# Altium PCB PCB.PcbDoc
Units mm, origin at the board's own origin, x right, y up, seen from the top; angles counter-clockwise.
Board outline 176 x 141 mm, 4 copper layers (Top Layer, Int1 (GND), Int2 (PWR), Bottom Layer), stack 1.369 mm thick; 72 components, 104 nets, 555 pads, 74 vias.
Unrouted connection lines stored in the file: 55.
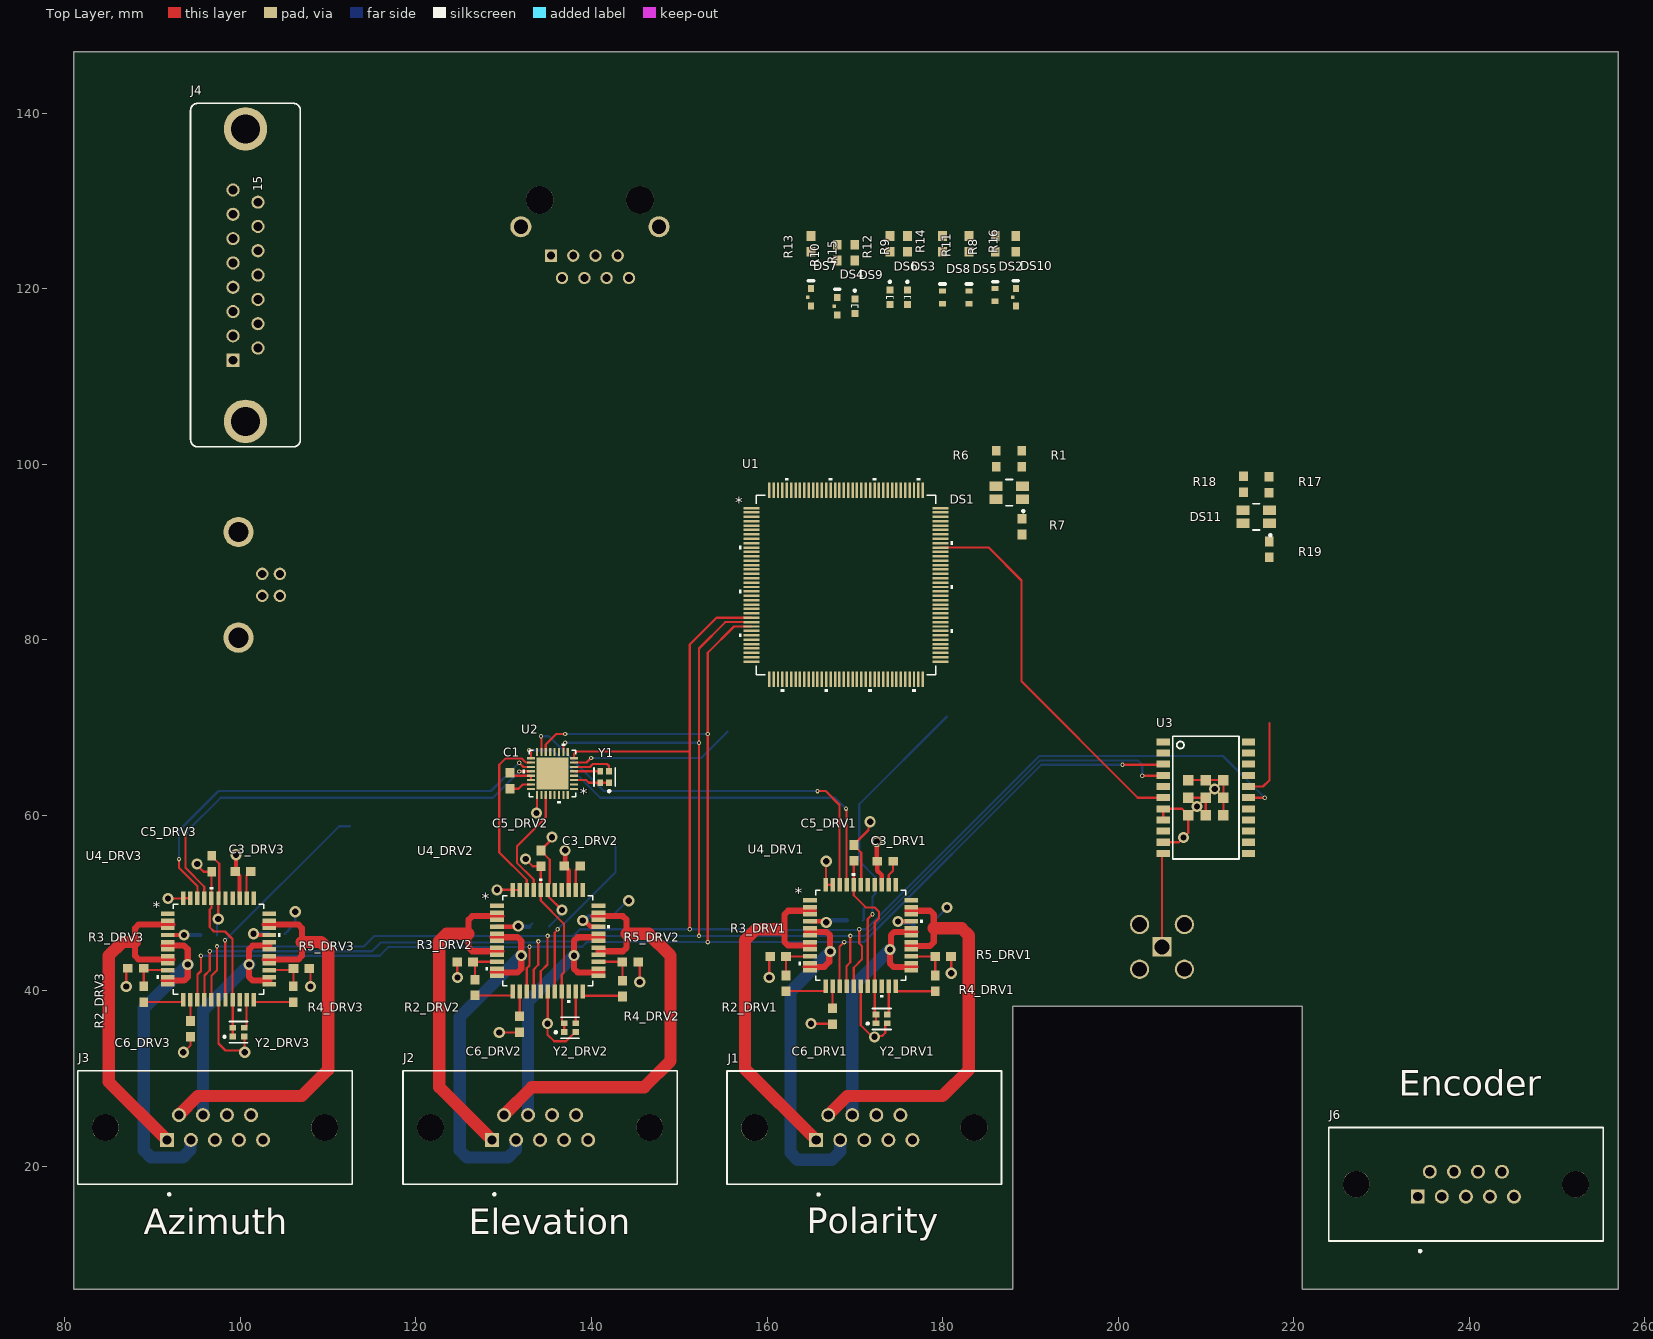
[diagram p0: Top Layer view]
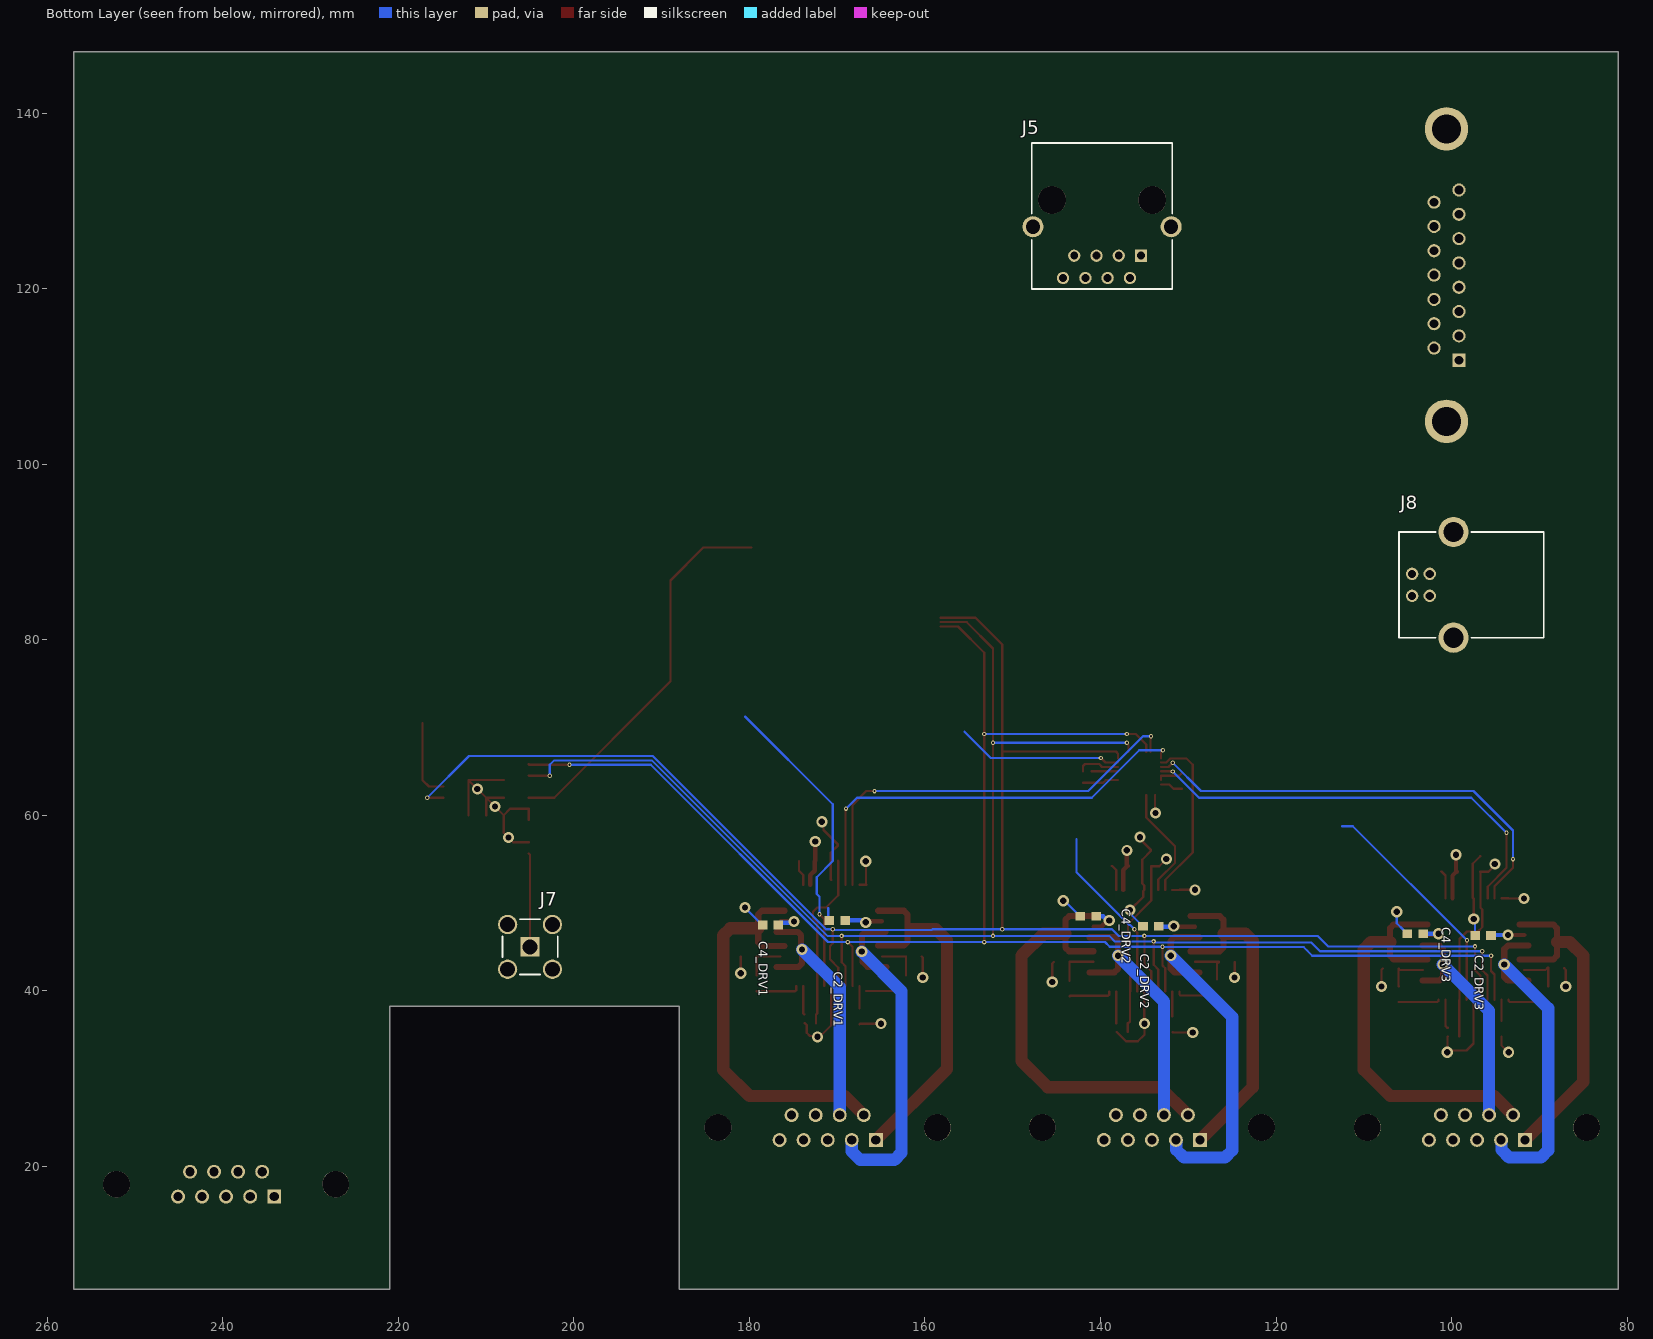
[diagram p1: Bottom Layer view, seen from below]
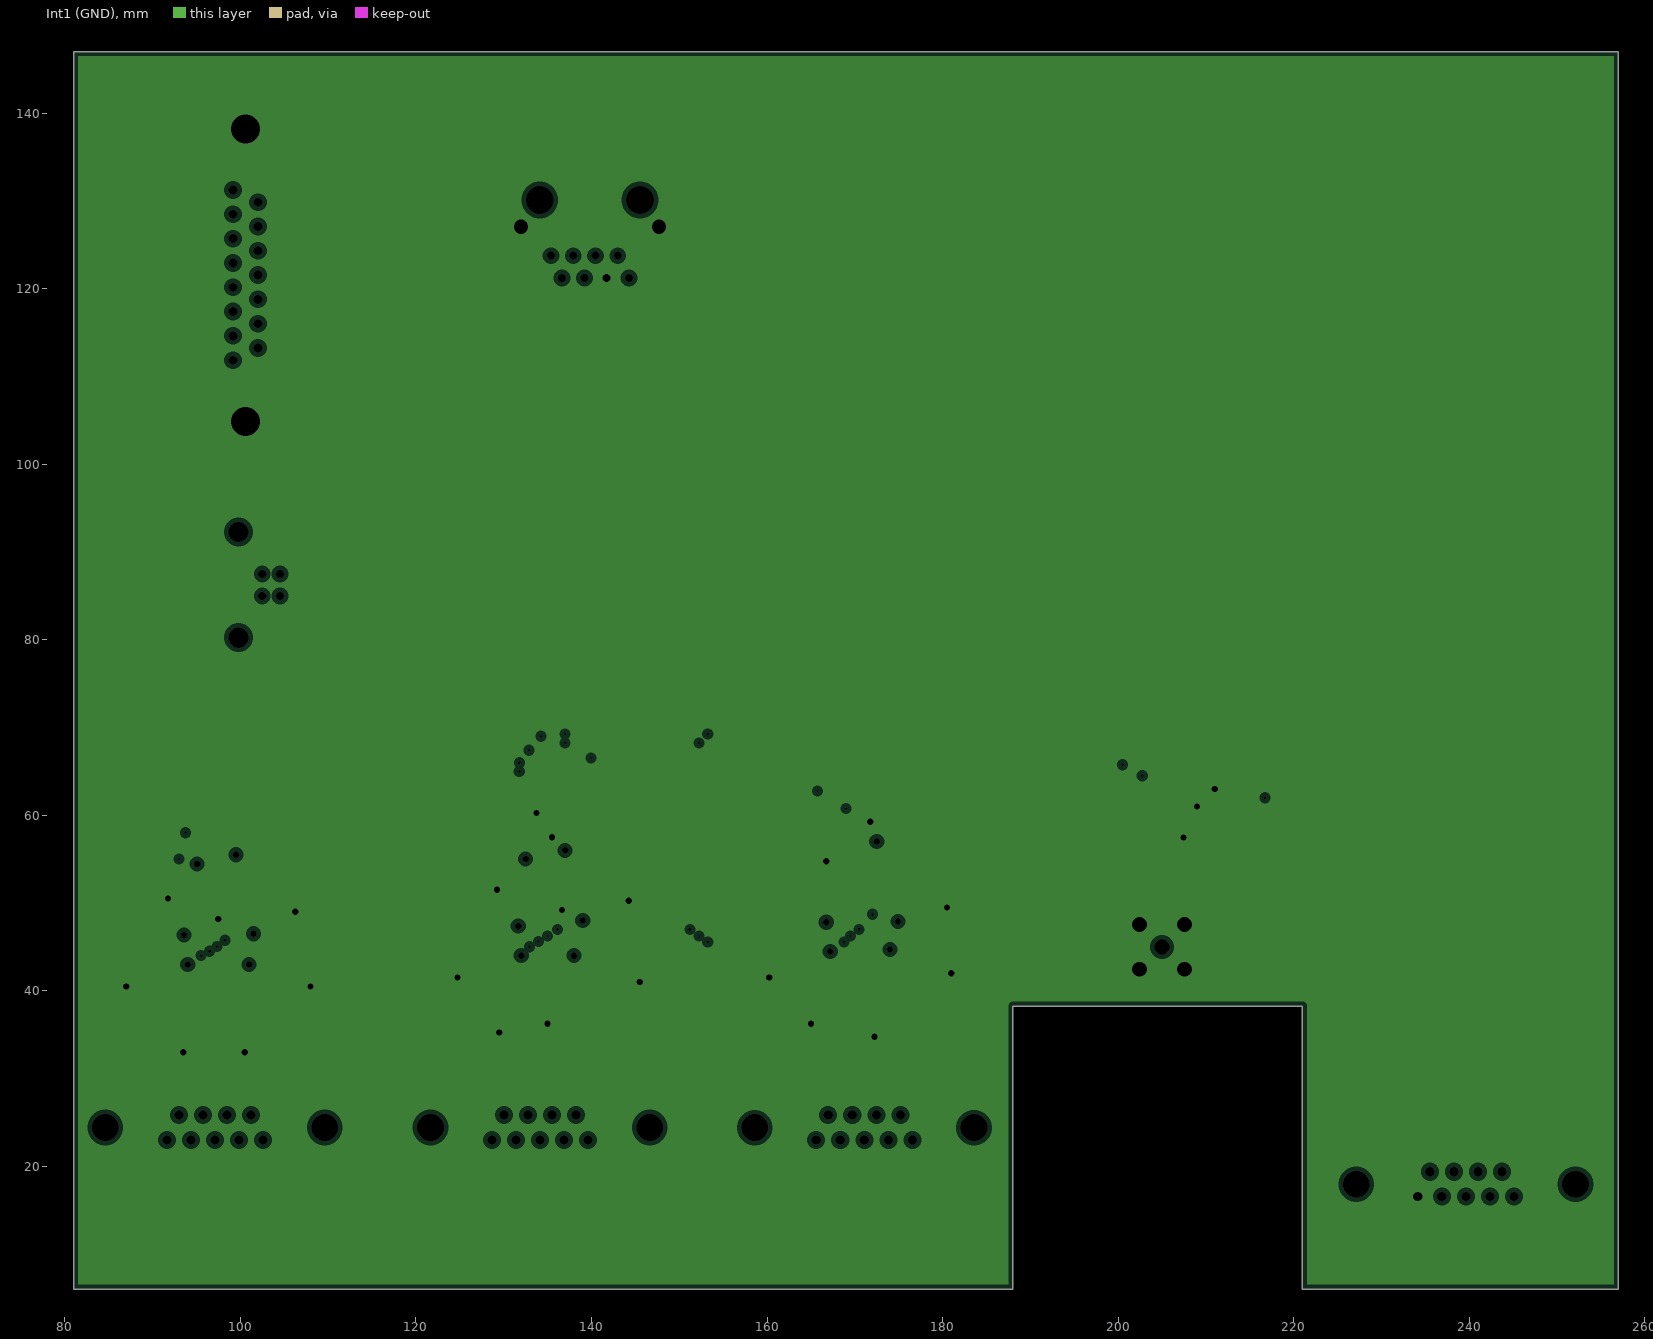
[diagram p2: Int1 (GND), clearances drawn from the general rule]
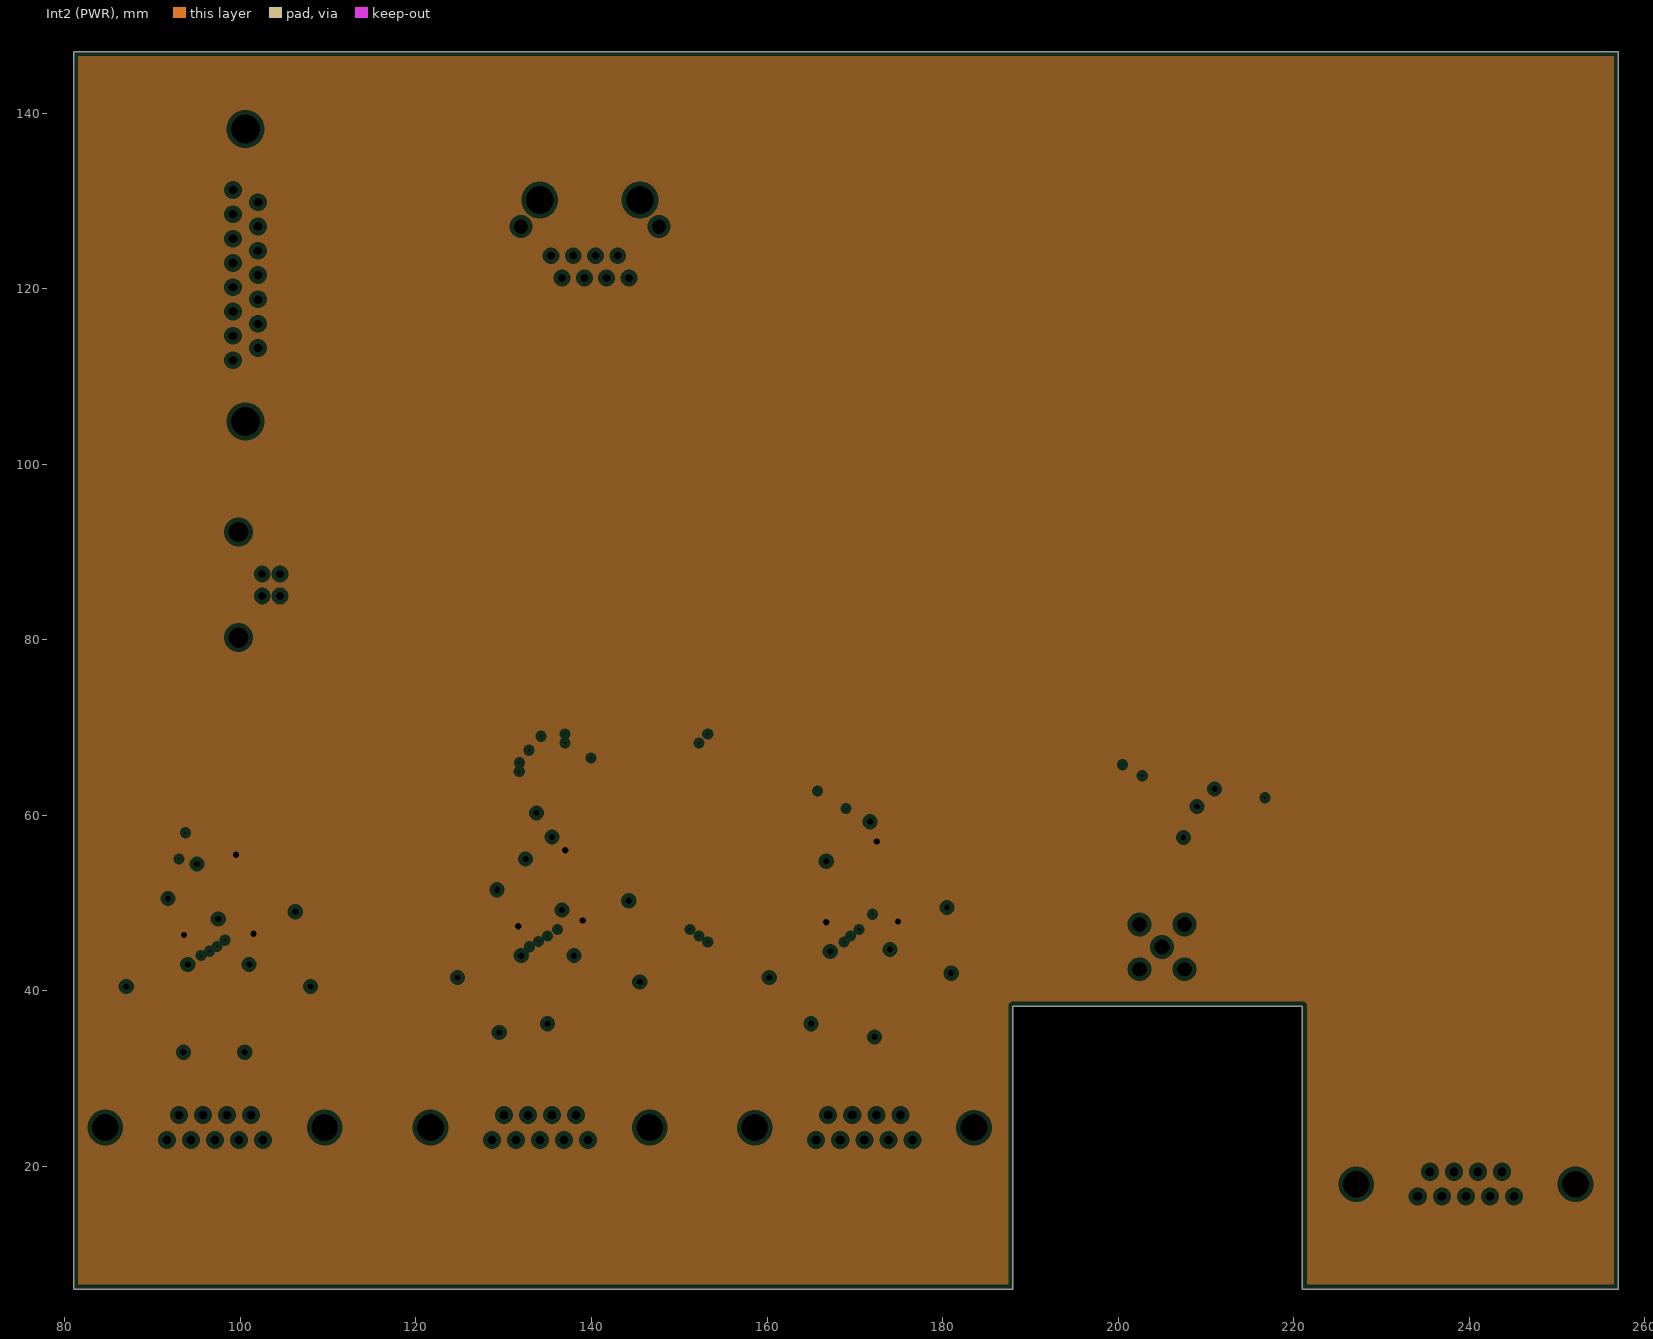
[diagram p3: Int2 (PWR), clearances drawn from the general rule]

## Layer stack, top to bottom
Top Solder: solder mask 0.0254, SM-001, Dk 4
Top Layer: signal copper 0.035
Dielectric 1: prepreg 0.1295, PP-017, Dk 4.3
Dielectric 2: prepreg 0.1295, PP-017, Dk 4.3
Int1 (GND): plane copper 0.035, net GND
Dielectric 3: core 0.7112, Core-039, Dk 4.8
Int2 (PWR): plane copper 0.035, net +12
Dielectric 4: prepreg 0.1295, PP-017, Dk 4.3
Dielectric 5: prepreg 0.1295, PP-017, Dk 4.3
Bottom Layer: signal copper 0.035
Bottom Solder: solder mask 0.0254, SM-001, Dk 4

## Board outline
188,6 188,38.25 221,38.25 221,6 257,6 257,147 81,147 81,6

## Design rules (kind name [scope] priority, off if disabled: settings)
BoardOutlineClearance [All] p1: gap=3 ignorepadtopadclearanceinfootprint=FALSE
Clearance "Via Same net clearance" [All] p1 off: gap=0 ignorepadtopadclearanceinfootprint=FALSE except(0.254: Via-Via)
Clearance [All] p2: gap=0.1 ignorepadtopadclearanceinfootprint=FALSE except(0: Arc-Hole Track-Hole SMDPad-Hole THPad-Hole Via-Hole Fill-Hole Poly-Hole Region-Hole Text-Text Text-Hole; 0.13: SMDPad-SMDPad SMDPad-THPad SMDPad-Via SMDPad-Fill SMDPad-Poly SMDPad-Region; 0.15: Arc-Text Track-Text SMDPad-Text THPad-Text Via-Text Fill-Text Poly-Text Region-Text; 0.254: Fill-Fill Fill-Poly Fill-Region Poly-Poly Poly-Region Region-Region; 0.5: THPad-THPad THPad-Via THPad-Fill THPad-Poly THPad-Region Via-Via Via-Fill Via-Poly Via-Region)
PlaneClearance [All] p1: clearance=0.508
PlaneConnect [All] p1: planeconnectstyle=Relief reliefexpansion=0.508 reliefentries=4 reliefconductorwidth=0.254 reliefairgap=0.254
PolygonConnect [All] p1: connectstyle=Relief reliefconductorwidth=0.254 reliefentries=4 polygonreliefangle="90 Angle" airgapwidth=0.254
RoutingVias RoutingVias_1 [InNetClass('Signal HS')] p1: holewidth=0.25 width=0.5 viastyle="Through Hole" minholewidth=0.2 minwidth=0.4 maxholewidth=0.35 maxwidth=0.7
RoutingVias [All] p2: holewidth=0.711 width=1.27 viastyle="Through Hole" minholewidth=0.711 minwidth=1.27 maxholewidth=0.711 maxwidth=1.27
SolderMaskExpansion [All] p1: expansion=0.102 istentingtop=FALSE
Width Width_1 [InNet('+12')] p1: maxlimit=1 minlimit=0.4 preferedwidth=0.5 minimp=50.000000 maximp=50.000000 favimp=50.000000
Width Motor [InNetClass('Motor')] p2: maxlimit=3 minlimit=0.7 preferedwidth=1.2 minimp=50.000000 maximp=50.000000 favimp=50.000000
Width Power [InNetClass('All Nets')] p3: maxlimit=0.254 minlimit=0.254 preferedwidth=0.254
Width [All] p4: maxlimit=1 minlimit=0.254 preferedwidth=0.254 minimp=50.000000 maximp=50.000000 favimp=50.000000
28 further rules are at their usual default settings.

## Classes and differential pairs
net class "Signal HS": "CSN AZI" "CSN CTRL" "CSN ELV" "CSN GPS" "CSN POL" "GPS ON_OFF" MISO MOSI NetU2_15 NetU2_17 NetU2_18 NetU2_19 NetU2_20 NetU2_27 SCK
net class Power: NetJ1_1
net class Motor: NetJ1_1 NetJ1_2 NetJ1_6 NetJ1_7 NetJ2_1 NetJ2_2 NetJ2_6 NetJ2_7 NetJ3_1 NetJ3_2 NetJ3_6 NetJ3_7
channel class Stepper-driver: DRV1 DRV2 DRV3
component class Main: C1 DS1 DS2 DS3 DS4 DS5 DS6 DS7 DS8 DS9 DS10 DS11 J1 J2 J3 J4 J5 J6 J7 J8 R1 R6 R7 R8 R9 R10 R11 R12 R13 R14 R15 R16 R17 R18 R19 U1 U2 U3 Y1
component class DRV3: C2_DRV3 C3_DRV3 C4_DRV3 C5_DRV3 C6_DRV3 R2_DRV3 R3_DRV3 R4_DRV3 R5_DRV3 U4_DRV3 Y2_DRV3
component class DRV2: C2_DRV2 C3_DRV2 C4_DRV2 C5_DRV2 C6_DRV2 R2_DRV2 R3_DRV2 R4_DRV2 R5_DRV2 U4_DRV2 Y2_DRV2
component class DRV1: C2_DRV1 C3_DRV1 C4_DRV1 C5_DRV1 C6_DRV1 R2_DRV1 R3_DRV1 R4_DRV1 R5_DRV1 U4_DRV1 Y2_DRV1

## Components (designator, comment, footprint, x,y, rotation, side; value= is the part's Value field where it differs from the comment)
C1 "Cap SMD" "C0603 (1608)" 130.726,63.92 r90 top value=10nF
C2_DRV1 "Cap SMD" "C0603 (1608)" 170,48 r180 bottom value=10nF (schematic designator C2)
C2_DRV2 "Cap SMD" "C0603 (1608)" 134.256,47.354 r180 bottom value=10nF (schematic designator C2)
C2_DRV3 "Cap SMD" "C0603 (1608)" 96.42,46.284 r180 bottom value=10nF (schematic designator C2)
C3_DRV1 "Cap SMD" "C0603 (1608)" 173.467,54.762 r0 top value=10nF (schematic designator C3)
C3_DRV2 "Cap SMD" "C0603 (1608)" 137.812,54.209 r0 top value=10nF (schematic designator C3)
C3_DRV3 "Cap SMD" "C0603 (1608)" 100.298,53.578 r0 top value=10nF (schematic designator C3)
C4_DRV1 "Cap SMD" "C0603 (1608)" 177.6,47.5 r180 bottom value=10nF (schematic designator C4)
C4_DRV2 "Cap SMD" "C0603 (1608)" 141.4,48.5 r180 bottom value=10nF (schematic designator C4)
C4_DRV3 "Cap SMD" "C0603 (1608)" 104.15,46.5 r180 bottom value=10nF (schematic designator C4)
C5_DRV1 "Cap SMD" "C0603 (1608)" 169.91,55.71 r270 top value=10nF (schematic designator C5)
C5_DRV2 "Cap SMD" "C0603 (1608)" 134.256,55.087 r270 top value=10nF (schematic designator C5)
C5_DRV3 "Cap SMD" "C0603 (1608)" 96.742,54.467 r270 top value=10nF (schematic designator C5)
C6_DRV1 "Cap SMD" "C0603 (1608)" 167.457,37.097 r90 top value=10nF (schematic designator C6)
C6_DRV2 "Cap SMD" "C0603 (1608)" 131.81,36.19 r90 top value=10nF (schematic designator C6)
C6_DRV3 "Cap SMD" "C0603 (1608)" 94.329,35.66 r90 top value=10nF (schematic designator C6)
DS1 "ASMB-BTE1-0B332" FP-ASMB-BTE1-0B332-MFG 187.6,96.75 r90 top
DS2 "TLMB1100-GS08" VISH-TLMX1100-2_V 186,119.275 r90 top
DS3 "APG1608SURKC/T" KING-LED0603-25-RED_V 176,119 r90 top
DS4 "HSMA-C120" AVAG-HSMA-C120-2_V 168,118 r90 top
DS5 "TLMB1100-GS08" VISH-TLMX1100-2_V 183,119 r90 top
DS6 "APG1608SURKC/T" KING-LED0603-25-RED_V 174,119 r90 top
DS7 "HSMA-C120" AVAG-HSMA-C120-2_V 165,119 r90 top
DS8 "TLMB1100-GS08" VISH-TLMX1100-2_V 180,119 r90 top
DS9 "APG1608SURKC/T" KING-LED0603-25-RED_V 170,118 r90 top
DS10 "HSMA-C120" AVAG-HSMA-C120-2_V 188.35,119 r90 top
DS11 "ASMB-BTE1-0B332" FP-ASMB-BTE1-0B332-MFG 215.75,94 r90 top
J1 "1-5747150-6" FP-1-5747150-6-MFG 171.09,24.406 r180 top
J2 "1-5747150-6" FP-1-5747150-6-MFG 134.15,24.425 r180 top
J3 "1-5747150-6" FP-1-5747150-6-MFG 97.105,24.42 r180 top
J4 "61801525023" 61801525023 100.58,121.54 r90 top
J5 "615008140421" 615008140421 139.825,128.274 r0 bottom
J6 "1-5747150-6" FP-1-5747150-6-MFG 239.629,17.96 r180 top
J7 "1053354-1" TECO-1053354-1_V 205,45 r180 bottom
J8 "61400416121" 61400416121 97.75,86.25 r90 bottom
R1 "Res" "R0603 (1608)" 189.025,100.612 r90 top
R2_DRV1 "Res" "R0603 (1608)" 162.163,40.84 r90 top (schematic designator R2)
R2_DRV2 "Res" "R0603 (1608)" 126.73,40.37 r90 top (schematic designator R2)
R2_DRV3 "Res" "R0603 (1608)" 88.995,39.608 r90 top (schematic designator R2)
R3_DRV1 "Res" "R0603 (1608)" 161.263,43.899 r180 top (schematic designator R3)
R3_DRV2 "Res" "R0603 (1608)" 125.609,43.287 r180 top (schematic designator R3)
R3_DRV3 "Res" "R0603 (1608)" 88.075,42.554 r180 top (schematic designator R3)
R4_DRV1 "Res" "R0603 (1608)" 179.181,40.84 r90 top (schematic designator R4)
R4_DRV2 "Res" "R0603 (1608)" 143.527,40.239 r90 top (schematic designator R4)
R4_DRV3 "Res" "R0603 (1608)" 106.013,39.608 r90 top (schematic designator R4)
R5_DRV1 "Res" "R0603 (1608)" 180.07,43.899 r0 top (schematic designator R5)
R5_DRV2 "Res" "R0603 (1608)" 144.416,43.287 r0 top (schematic designator R5)
R5_DRV3 "Res" "R0603 (1608)" 106.954,42.534 r0 top (schematic designator R5)
R6 "Res" "R0603 (1608)" 186.125,100.612 r90 top
R7 "Res" "R0603 (1608)" 189.052,92.892 r270 top
R8 "Res" "R0603 (1608)" 186,125.1 r90 top
R9 "Res" "R0603 (1608)" 176,125.1 r90 top
R10 "Res" "R0603 (1608)" 168,124.1 r90 top
R11 "Res" "R0603 (1608)" 183,125.1 r90 top
R12 "Res" "R0603 (1608)" 174,125.1 r90 top
R13 "Res" "R0603 (1608)" 165,125.1 r90 top
R14 "Res" "R0603 (1608)" 180,125.1 r90 top
R15 "Res" "R0603 (1608)" 170,124.1 r90 top
R16 "Res" "R0603 (1608)" 188.35,125.1 r90 top
R17 "Res" "R0603 (1608)" 217.196,97.658 r90 top
R18 "Res" "R0603 (1608)" 214.289,97.709 r90 top
R19 "Res" "R0603 (1608)" 217.226,90.291 r270 top
U1 "STM32F765ZIT7" LQFP-144_STM-M 169,86.25 r0 top
U2 "TMC429-LI" QFN32_5X5_TRI-M 135.552,64.75 r180 top
U3 "A2200-A" XCVR_A2200-A 210,62 r0 top
U4_DRV1 "TMC2660-PA" LQFP44_12X12_TRI-M 170.672,46.312 r0 top (schematic designator U4)
U4_DRV2 "TMC2660-PA" LQFP44_12X12_TRI-M 135.018,45.7 r0 top (schematic designator U4)
U4_DRV3 "TMC2660-PA" LQFP44_12X12_TRI-M 97.504,44.751 r0 top (schematic designator U4)
Y1 "ASA-16.000MHZ-L-T" FP-ASA-MFG 141.5,64.35 r90 top
Y2_DRV1 "ASA-16.000MHZ-L-T" FP-ASA-MFG 173.07,36.79 r0 top (schematic designator Y2)
Y2_DRV2 "ASA-16.000MHZ-L-T" FP-ASA-MFG 137.54,35.79 r0 top (schematic designator Y2)
Y2_DRV3 "ASA-16.000MHZ-L-T" FP-ASA-MFG 99.79,35.29 r0 top (schematic designator Y2)

## Footprints (in the part's own frame and the unit in brackets; to place one, negate y for a bottom-side part, rotate by r counter-clockwise, add the part's x,y. Pads: shape width x height; smd on the part's side, far side on the other; paste and mask are expansions set on the pad)
61400416121 [mm] "USB 2.0 Type B Horizontal"
  round 1.42 hole 0.92: 1(1.25,6.74) 2(-1.25,6.74) 3(-1.25,4.74) 4(1.25,4.74)
  round 3.45 hole 2.3: Shell(-6.02,2.03) Shell(6.02,2.03)
  silkscreen extent -6.02,-8.25 6.02,8.25, body extent -7.48,-8.25 7.48,8.25, height 11.08
61801525023 [mm] "15 pins, straight"
  rect 1.5x1.5 hole 1: 1(-9.695,1.42)
  round 1.5 hole 1: 2(-6.925,1.42) 3(-4.155,1.42) 4(-1.385,1.42) 5(1.385,1.42) 6(4.155,1.42) 7(6.925,1.42) 8(9.695,1.42) 9(-8.31,-1.42) 10(-5.54,-1.42) 11(-2.77,-1.42) 12(0,-1.42) 13(2.77,-1.42) 14(5.54,-1.42) 15(8.31,-1.42)
  round 4.95 hole 3.3: M1(-16.66,0) M2(16.66,0)
  silkscreen extent -19.57,-6.25 19.57,6.25, body extent -19.57,-6.25 19.57,6.25, height 12.97
615008140421 [mm] "Modular Jack Vertical Shielded 8P8C Rear Post"
  rect 1.4x1.4 hole 0.9: 1(-4.445,4.524)
  round 1.4 hole 0.9: 2(-3.175,7.064) 3(-1.905,4.524) 4(-0.635,7.064) 5(0.635,4.524) 6(1.905,7.064) 7(3.175,4.524) 8(4.445,7.064)
  round 3.17 hole 3.17 unplated: MH1(-5.715,-1.826) MH2(5.715,-1.826)
  round 2.4 hole 1.6: S1(-7.875,1.224) S2(7.875,1.224)
  silkscreen extent -8,-8.32 8,8.32, body extent -8,-8.32 8,8.33, height 16.65
AVAG-HSMA-C120-2_V [mm] "LED, 2-Leads, Body 1.6x0.6mm"
  rect 0.8x0.7 smd: 1(-1,0) 2(1,0)
  rect 0.4x0.4 smd: 3(0,0.35)
  silkscreen extent 1.9,-0.3 1.9,0.3, body extent -0.8,-0.3 0.8,0.3, height 1
"C0603 (1608)" [mm] "Chip Capacitor, 2-Leads, Body 1,60x0,81mm, IPC Low Density"
  rect 1.1x1 smd: 1(-0.9,0) 2(0.9,0)
  body extent -0.8,-0.41 0.8,0.42, height 0.79
FP-1-5747150-6-MFG [mm]
  rect 1.59x1.59 hole 1.04 paste-1000 mask+0: 1(5.485,1.42)
  round 1.59 hole 1.04 paste-1000 mask+0: 2(2.745,1.42) 3(0.005,1.42) 4(-2.735,1.42) 5(-5.475,1.42) 6(4.115,-1.42) 7(1.375,-1.42) 8(-1.365,-1.42) 9(-4.105,-1.42)
  round 3.05 hole 3.05 unplated paste-1000 mask+0: ""(-12.495,0) ""(12.495,0)
  silkscreen extent -15.64,-6.47 15.64,7.74, body extent -15.74,-6.57 15.74,6.57, height 0.25
FP-ASA-MFG [mm]
  rect 0.75x0.65 smd paste+0 mask+0: 1(-0.65,-0.5) 2(0.65,-0.5) 3(0.65,0.5) 4(-0.65,0.5)
  silkscreen extent -1.72,-1.2 1.05,1.2, body extent -1.15,-0.95 1.15,0.95, height 0.25
FP-ASMB-BTE1-0B332-MFG [mm]
  rect 1.1x1.5 smd paste+0 mask+0: 1(-0.75,-1.5) 2(-0.75,1.5) 3(0.75,1.5) 4(0.75,-1.5)
  silkscreen extent -2.22,-1.73 1.5,0.38, body extent -1.6,-2.35 1.6,2.35, height 0.25
KING-LED0603-25-RED_V [mm] "LED, SMT, Body 1.6x0.8mm, 0.28mm Thickness, Red"
  rect 0.8x0.8 smd paste+0: 1(-0.825,0) 2(0.825,0)
  silkscreen extent -0.2,-0.4 1.9,0.4, body extent -0.8,-0.4 0.8,0.4, height 0.28
LQFP44_12X12_TRI-M [mil]
  rect 61x20 smd paste+0 mask+0: 1(-227.5,157.48) 2(-227.5,125.98) 3(-227.5,94.49) 4(-227.5,62.99) 5(-227.5,31.5) 6(-227.5,0) 7(-227.5,-31.5) 8(-227.5,-62.99) 9(-227.5,-94.49) 10(-227.5,-125.98) 11(-227.5,-157.48) 23(227.5,-157.48) 24(227.5,-125.98) 25(227.5,-94.49) 26(227.5,-62.99) 27(227.5,-31.5) 28(227.5,0) 29(227.5,31.5) 30(227.5,62.99) 31(227.5,94.49) 32(227.5,125.98) 33(227.5,157.48)
  rect 20x61 smd paste+0 mask+0: 12(-157.48,-227.5) 13(-125.98,-227.5) 14(-94.49,-227.5) 15(-62.99,-227.5) 16(-31.5,-227.5) 17(0,-227.5) 18(31.5,-227.5) 19(62.99,-227.5) 20(94.49,-227.5) 21(125.98,-227.5) 22(157.48,-227.5) 34(157.48,227.5) 35(125.98,227.5) 36(94.49,227.5) 37(62.99,227.5) 38(31.5,227.5) 39(0,227.5) 40(-31.5,227.5) 41(-62.99,227.5) 42(-94.49,227.5) 43(-125.98,227.5) 44(-157.48,227.5)
  silkscreen extent -278,-278 278,278, body extent -236,-236 236,236, height 63
LQFP-144_STM-M [mil]
  rect 70x11 smd paste+0 mask+0: 1(-424,344.49) 2(-424,324.8) 3(-424,305.12) 4(-424,285.43) 5(-424,265.75) 6(-424,246.06) 7(-424,226.38) 8(-424,206.69) 9(-424,187.01) 10(-424,167.32) 11(-424,147.64) 12(-424,127.95) 13(-424,108.27) 14(-424,88.58) 15(-424,68.9) 16(-424,49.21) 17(-424,29.53) 18(-424,9.84) 19(-424,-9.84) 20(-424,-29.53) 21(-424,-49.21) 22(-424,-68.9) 23(-424,-88.58) 24(-424,-108.27) 25(-424,-127.95) 26(-424,-147.64) 27(-424,-167.32) 28(-424,-187.01) 29(-424,-206.69) 30(-424,-226.38) 31(-424,-246.06) 32(-424,-265.75) 33(-424,-285.43) 34(-424,-305.12) 35(-424,-324.8) 36(-424,-344.49) 73(424,-344.49) 74(424,-324.8) 75(424,-305.12) 76(424,-285.43) 77(424,-265.75) 78(424,-246.06) 79(424,-226.38) 80(424,-206.69) 81(424,-187.01) 82(424,-167.32) 83(424,-147.64) 84(424,-127.95) 85(424,-108.27) 86(424,-88.58) 87(424,-68.9) 88(424,-49.21) 89(424,-29.53) 90(424,-9.84) 91(424,9.84) 92(424,29.53) 93(424,49.21) 94(424,68.9) 95(424,88.58) 96(424,108.27) 97(424,127.95) 98(424,147.64) 99(424,167.32) 100(424,187.01) 101(424,206.69) 102(424,226.38) 103(424,246.06) 104(424,265.75) 105(424,285.43) 106(424,305.12) 107(424,324.8) 108(424,344.49)
  rect 11x70 smd paste+0 mask+0: 37(-344.49,-424) 38(-324.8,-424) 39(-305.12,-424) 40(-285.43,-424) 41(-265.75,-424) 42(-246.06,-424) 43(-226.38,-424) 44(-206.69,-424) 45(-187.01,-424) 46(-167.32,-424) 47(-147.64,-424) 48(-127.95,-424) 49(-108.27,-424) 50(-88.58,-424) 51(-68.9,-424) 52(-49.21,-424) 53(-29.53,-424) 54(-9.84,-424) 55(9.84,-424) 56(29.53,-424) 57(49.21,-424) 58(68.9,-424) 59(88.58,-424) 60(108.27,-424) 61(127.95,-424) 62(147.64,-424) 63(167.32,-424) 64(187.01,-424) 65(206.69,-424) 66(226.38,-424) 67(246.06,-424) 68(265.75,-424) 69(285.43,-424) 70(305.12,-424) 71(324.8,-424) 72(344.49,-424) 109(344.49,424) 110(324.8,424) 111(305.12,424) 112(285.43,424) 113(265.75,424) 114(246.06,424) 115(226.38,424) 116(206.69,424) 117(187.01,424) 118(167.32,424) 119(147.64,424) 120(127.95,424) 121(108.27,424) 122(88.58,424) 123(68.9,424) 124(49.21,424) 125(29.53,424) 126(9.84,424) 127(-9.84,424) 128(-29.53,424) 129(-49.21,424) 130(-68.9,424) 131(-88.58,424) 132(-108.27,424) 133(-127.95,424) 134(-147.64,424) 135(-167.32,424) 136(-187.01,424) 137(-206.69,424) 138(-226.38,424) 139(-246.06,424) 140(-265.75,424) 141(-285.43,424) 142(-305.12,424) 143(-324.8,424) 144(-344.49,424)
  silkscreen extent -479,-479 479,479, body extent -437,-437 437,437, height 63
QFN32_5X5_TRI-M [mm]
  rect 0.908x0.255 smd paste+0 mask+0: 1(-2.448,1.75) 2(-2.448,1.25) 3(-2.448,0.75) 4(-2.448,0.25) 5(-2.448,-0.25) 6(-2.448,-0.75) 7(-2.448,-1.25) 8(-2.448,-1.75) 17(2.448,-1.75) 18(2.448,-1.25) 19(2.448,-0.75) 20(2.448,-0.25) 21(2.448,0.25) 22(2.448,0.75) 23(2.448,1.25) 24(2.448,1.75)
  rect 0.255x0.908 smd paste+0 mask+0: 9(-1.75,-2.448) 10(-1.25,-2.448) 11(-0.75,-2.448) 12(-0.25,-2.448) 13(0.25,-2.448) 14(0.75,-2.448) 15(1.25,-2.448) 16(1.75,-2.448) 25(1.75,2.448) 26(1.25,2.448) 27(0.75,2.448) 28(0.25,2.448) 29(-0.25,2.448) 30(-0.75,2.448) 31(-1.25,2.448) 32(-1.75,2.448)
  rect 3.607x3.607 smd paste+0 mask+0: 33(0,0)
  silkscreen extent -2.63,-3.41 3.41,3.41, body extent -2.5,-2.5 2.5,2.5, height 0.99
"R0603 (1608)" [mm]
  rect 1.1x1 smd: 1(-0.9,0) 2(0.9,0)
  body extent -0.8,-0.42 0.8,0.38, height 0.45
TECO-1053354-1_V [mm] "THD, 5-Leads, Body 6.3x6.3mm, Pitch 2.55mm"
  rect 2.2x2.2 hole 1.7: 1(0,0)
  round 2.2 hole 1.7: 2(-2.55,2.55) 3(-2.55,-2.55) 4(2.55,-2.55) 5(2.55,2.55)
  silkscreen extent -3.15,-3.15 3.15,3.15, body extent -3.17,-3.17 3.18,3.18, height 9.6
VISH-TLMX1100-2_V [mm] "SMD, 2-Leads, Body 1.6x0.8mm"
  rect 0.6x0.8 smd: 1(-0.725,0) 2(0.725,0)
  silkscreen extent 1.53,-0.3 1.53,0.3, body extent -0.8,-0.4 0.8,0.4, height 0.65
XCVR_A2200-A [mm]
  rect 1.5x0.8 smd: 1(-4.85,6.35) 2(-4.85,5.08) 3(-4.85,3.81) 4(-4.85,2.54) 5(-4.85,1.27) 6(-4.85,0) 7(-4.85,-1.27) 8(-4.85,-2.54) 9(-4.85,-3.81) 10(-4.85,-5.08) 11(-4.85,-6.35) 12(4.85,-6.35) 13(4.85,-5.08) 14(4.85,-3.81) 15(4.85,-2.54) 16(4.85,-1.27) 17(4.85,0) 18(4.85,1.27) 19(4.85,2.54) 20(4.85,3.81) 21(4.85,5.08) 22(4.85,6.35)
  rect 1.2x1.2 smd: 23(-2,2) 24(-2,0) 25(-2,-2) 26(0,-2) 27(0,0) 28(0,2) 29(2,2) 30(2,0) 31(2,-2)
  silkscreen extent -3.77,-7 3.77,7

## Part data
DS1 DS11: library part "ASMB-BTE1-0B332 RGB LED", "LED RGB DIFFUSED 4PLCC SMD", Colour="Blue, Green, Red", Forward Current=20mA, Forward Voltage=3.1/3.1/2.1V, Manufacturer=Broadcom, Max Junction Temp=+110°C, Package=0, Power Dissipation=90/90/78mW, Reverse Voltage=4V, Temperature="-40°C to +100°C", Temperature Range High=+100°C, Temperature Range Low=-40°C, Automotive=No, Category=Diode, ComponentLink2Description=Datasheet, ComponentLink2URL=https://docs.broadcom.com/docs/AV02-4236EN, Device Class L1=Optoelectronics, Device Class L2=LEDs, Device Class L3=unset, Digikey Description="LED RGB DIFFUSED 4PLCC SMD", Height=2.1mm, Lead Free=Yes, Led Orientation="Top View", Luminous Intensity=350/1500/630mcd, Manufacturer Part Number=ASMB-BTE1-0B332, Octopart=https://octopart.com/asmb-bte1-0b332-broadcom-71127192, Peak Emmision Wavelength=464/521/629nm, RoHS=TRUE, Viewing Angle=110°, Wavelength=469/529/622nm
DS2 DS5 DS8: library part CMP-1666-00028-1, "Blue LED, 10 mA, 3.9 V, -40 to 100 degC, 2-Pin SMD (0603), RoHS, Tape and Reel", Capacitance="10 nF", Case\Package=Radial, Max Operating Temperature="125 degC", Min Operating Temperature="-55 degC", Package Quantity=500, Tolerance=10%, Type (Capacitors)=X7R, Voltage Rating="100 V", ComponentLink1Description="Manufacturer URL", ComponentLink1URL=http://www.vishay.com/, ComponentLink2Description=Datasheet, ComponentLink2URL=http://download.siliconexpert.com/pdfs/2016/8/7/12/43/26/667/vsh_/manual/379263299541529tlmb1100.pdf, DatasheetVersion="Rev. 2.7, 03/2016", Height="2.54 mm", Lead Pitch="2.54 mm", Length="5.33 mm", Mount="Through Hole", PackageDescription="2-Pin Surface Mount Device, Body 1.6 x 0.8 mm", PackageReference=0603, Packaging=Bulk, Pins=2, Radiation Hardening=No, REACH SVHC="No SVHC", RoHSCompliant=true, Width="3.81 mm"
DS3 DS6 DS9: library part CMP-0404-00004-1, "Ultra Thin Hyper Red SMD Chip LED Lamp, 2 to 2.5 V, -40 to 85 degC, Body 1.6 x 0.8 mm, 0.28 mm Thickness, RoHS, Tape and Reel", Forward Voltage="2 to 2.5 V", Manufacturer=Kingbright, Operating Temperature="-40 to 85 degC", ComponentLink1Description="Manufacturer URL", ComponentLink1URL=http://www.kingbrightusa.com/, ComponentLink2Description=Datasheet, ComponentLink2URL=http://www.kingbrightusa.com/images/catalog/SPEC/APG1608SURKC-T.pdf, ComponentLink3Description="Package Specification", ComponentLink3URL=http://www.kingbrightusa.com/images/catalog/SPEC/APG1608SURKC-T.pdf, DatasheetVersion="Rev. V.5A", Dice="Hyper Red (AlGaInP)", IR (Max)="10 uA", Lens Type="Water Clear", Luminous Intensity mcd @ 20 mA (Min.)=55, Luminous Intensity mcd @ 20 mA (Typ.)=110, Mounting Technology="Surface Mount", PackageDescription="2-Pin SMT, Body 1.6 x 0.8 mm, 0.28mm Thickness, Red", PackageReference=LED0603-25-RED, PackageVersion="Rev. V.5A", Packing="Tape and Reel", PartNumber=APG1608SURKC/T, RoHS=TRUE, Viewing Angle=120
DS4 DS7 DS10: library part CMP-2000-06419-1, "High Performance Chip LED, 1.9 V, -40 to 85 degC, 2-Pin SMD (0603), RoHS, Tape and Reel", Emitting Color=Amber, Forward Current=25mA, Forward Voltage=2.4V, Manufacturer=Avago, Operating Temp Range=-40Cto85C, Operating Temperature Classification=Industrial, Package Description="2-Pin Surface Mount Device, Body 1.6 x 0.6 mm", Package Reference=0603, Package Type=ChipLed, Power Dissipation=60W, Reverse Voltage=5V, Test Current (It)=20mA, Chip Material=AlGaInP, Datasheet URL=http://docs.avagotech.com/docs/AV02-0975EN?_ga=1.69010961.1008964631.1477559468, Datasheet Version=05/2010, DELETED=Compliant, Dominant Wave Length=592nm, High Brightness=No, Lens Dimensions=1.2x0.6x0.6mm, Lum Intensity=90mcd, Luminous Intensity=90mcd, Main Category=ChipLED, Manufacturer URL=http://www.avagotech.com/, Mounting=SurfaceMount, Mounting Technology=SurfaceMount, Number of  Elements=1, Packaging=TapeandReel, Peak Wavelength=595nm, Pin Count=2, Product Depth (mm)=0.6mm, Product Height (mm)=1mm, Product Length (mm)=1.6mm, Rad Hardened=No, Shape Type=Rectangular, Type=Uni-Color, Viewing Angle=155deg
J1 J2 J3 J6: library part CMP-03367-000009-1, "CONN D-SUB RCPT 9POS VERT SOLDER", Current Rating=6A, Manufacturer="TE Connectivity", Temperature="-55°C to +105°C", Temperature Range High=+105°C, Temperature Range Low=-55°C, Automotive=No, Category=Conn, ComponentLink2Description=Datasheet, ComponentLink2URL=https://www.te.com/usa-en/product-1-5747150-6.html?te_bu=Cor&te_type=other&te_campaign=oct_glo_cor-oct-global-oth-prtnr-fy19-oct-octo-buy-bom_sma-298_2&elqCampaignId=35216, Conn Gender=Female, Conn Orientation=Vertical, Contact Material=Gold,Nickel, Device Class L1=Connectors, Device Class L2="D-Sub Connectors", Device Class L3=unset, Digikey Description="CONN D-SUB RCPT 9POS VERT SOLDER", Height=12.54mm, Is Female=yes, Lead Free=Yes, Manufacturer Part Number=1-5747150-6, Mouser Description="D-Sub Standard Connectors RECP FRNT MTL SHL 9P female screwlocks", Number Of Contacts=9, Octopart=https://octopart.com/1-5747150-6-te+connectivity-39500344, Package=1-5747150-6, Pitch=2.74mm, RoHS=TRUE, Shielding=false
J4: library part CMP-1502-00277-1, "Male PCB Connector WR-DSUB, Vertical, 15 pins", Contact Resistance=30mOhm, Manufacturer="Wurth Elektronik", Operating Temperature=-40to85degC, Rated Current=3A, Working Voltage=125VAC, Datasheet URL=https://katalog.we-online.de/em/datasheet/6180xx25023.pdf, Gender=Male, Manufacturer URL=http://www.we-online.de, Mounting Technology=THT, Orientation=Vertical, Package Reference=61801525023, Packaging=Tray, Part Number=61801525023, Pin Number=15, Publisher=WurthElektronik
J5: library part CMP-1502-01733-1, "Modular Jack WR-MJ, Rear Post, Shielded, Vertical Entry, THT, 8P8C", Contact Resistance=20mOhm, Manufacturer="Wurth Elektronik", Operating Temperature=-40to85degC, Rated Current=1.5A, Withstanding Voltage=1000VAC, Working Voltage=120VAC, Compliance=Leadfree/RoHS, Datasheet URL=https://katalog.we-online.com/em/datasheet/615008140421.pdf, Entrance=Vertical, Manufacturer URL=http://www.we-online.de, Mounting Technology=THT, Package Reference=615008140421, Packaging=Tray, Part Number=615008140421, Pin Number=8P8C, Port=1x1, Publisher=WurthElektronik
J7: library part CMP-2000-05830-1, "Female Coaxial Connector, Pitch 2.55 mm, Height 9.5 mm, Tail Length 3.9 mm, RoHS, Bulk", Manufacturer="TE Connectivity", Package Description="Female Coaxial Connector, Pitch 2.55 mm, Height 9.5 mm, Tail Length 3.9 mm", Standard Package=125, 3D Model=1053354-1.pdf, Category=Connectors,Interconnects, Connector Style=SMA, Connector Type=Jack,FemaleSockets, Contact Termination=Solder, Datasheet URL=http://www.te.com/commerce/DocumentDelivery/DDEController?Action=srchrtrv&DocNm=1053354&DocType=Customer+Drawing&DocLang=English, Datasheet Version="Rev. B, 05/2011", Dynamic Catalog=SMA, Family=CoaxialConnectors(RF), Fastening Type=Threaded, Impedance=50Ohm, Manufacturer URL=http://www.te.com/, Mounting Technology=ThroughHole, Mounting Type=ThroughHole, Other Names="2062000000 / A30046", Package Reference=1053354-1, Packaging=Bulk, RoHS Information=1053354-1StatementofCompliance, Series=SMA
J8: library part CMP-1502-03243-1, "USB 2.0 Type B Receptacle WR-COM, Horizontal, THT, with Pads and Pegs", Contact Resistance=20mOhm, Manufacturer="Wurth Elektronik", Operating Temperature=-40to105degC, Rated Current=1.5A, Working Voltage=30VAC, Connector Type=USB2.0TypeB, Datasheet URL=https://katalog.we-online.de/em/datasheet/61400416121.pdf, Gender=Receptacle, Manufacturer URL=http://www.we-online.de, Mounting Technology=THT, Orientation=Horizontal, Package Reference=61400416121, Packaging=Tray, Part Number=61400416121, Publisher=WurthElektronik
R1 R2_DRV1 R2_DRV2 R2_DRV3 R3_DRV1 R3_DRV2 R3_DRV3 R4_DRV1 R4_DRV2 R4_DRV3 R5_DRV1 R5_DRV2 R5_DRV3 R6 R7 R8 R9 R10 R11 R12 R13 R14 R15 R16 R17 R18 R19: library part "Resistor EU"
U1 U2 U4_DRV1 U4_DRV2 U4_DRV3: "No Description Available", Built_By=EMA_Jessica, RefDes=RefDes, Type=DEV
  U1: Copyright="Copyright (C) 2018 Accelerated Designs. All rights reserved", Manufacturer_Part_Number=STM32F765ZIT7, SourceLibrary=Add_to_database_2020-10-19, Vendor=STMicroelectronics
  U2: Copyright="Copyright (C) 2016 Accelerated Designs. All rights reserved", Manufacturer_Part_Number=TMC429-LI, SourceLibrary=Trinamic_2018-10-17, Vendor=TRINAMIC
  U4_DRV1 U4_DRV2 U4_DRV3: Copyright="Copyright (C) 2016 Accelerated Designs. All rights reserved", Manufacturer_Part_Number=TMC2660-PA, SourceLibrary=Trinamic_2018-10-17, Vendor=TRINAMIC
U3: "SiRFstarIVâ„¢ RF Receiver GPS 1.575GHz -163dBm 115.2kbps Module", Package="Module Maestro Wireless", Availability=Unavailable, MF="Maestro Wireless", MP=A2200-A, Price=None, SnapEDA_Link=https://www.snapeda.com/parts/A2200-A/Maestro%20Wireless%20Solutions/view-part/51723/?ref=snap
Y1 Y2_DRV1 Y2_DRV2 Y2_DRV3: library part CMP-27762-000001-1, "XTAL OSC XO 16.0000MHZ HCMOS SMD", Frequency=16MHz, Load Capacitance=15pF, Manufacturer=Abracon, Max Supply Current=5mA, Max Supply Voltage=3.66V, Min Supply Voltage=2.97V, Package=ASA, Temperature="-40°C to +85°C", Temperature Range High=+85°C, Temperature Range Low=-40°C, Automotive=No, Category=Crys, ComponentLink2Description=Datasheet, ComponentLink2URL=https://abracon.com/Oscillators/ASA.pdf, Device Class L1="Passive Components", Device Class L2="Crystals / Oscillators", Device Class L3=Oscillators, Digikey Description="XTAL OSC XO 16.0000MHZ HCMOS SMD", Footprint Url=https://abracon.com/Support/PackageDrawing/Oscillators/ASA.PDF, Height=0.8mm, Lead Free=Yes, Manufacturer Part Number=ASA-16.000MHZ-L-T, Mouser Description="Standard Clock Oscillators 16.000MHz 3.3V -40C +85C", Octopart=https://octopart.com/asa-16.000mhz-l-t-abracon-21707822, RoHS=TRUE, Series=ASA, Stability=50ppm

## Via types
v1: diameter 1.27, hole 0.711, Top Layer to Bottom Layer, 43 vias
v2: diameter 0.5, hole 0.25, Top Layer to Bottom Layer, 31 vias

## Nets (pads, with @x,y where several pads share a name; then routed paths per layer and width w, separated by ;. In a path a pad name is that pad's centre, name@x,y a point inside that pad or via, vN(x,y) a via of type N, cw(c..) or ccw(c..) an arc to the next point about the centre after c; other vN are vias at no path point)
+3v3: C1.2 C5_DRV1.2 C5_DRV2.2 C5_DRV3.2 DS1.2 DS11.2 U2.3 U2.21 U2.22 U3.20 U3.22 U4_DRV1.19 U4_DRV1.40 U4_DRV2.19 U4_DRV2.40 U4_DRV3.19 U4_DRV3.40 Y1.1 Y1.4 Y2_DRV1.1 Y2_DRV1.4 Y2_DRV2.1 Y2_DRV2.4 Y2_DRV3.1 Y2_DRV3.4 | length 72.9
  Top Layer w0.254: v1(95.075,54.455) 95.075,54.296 95.804,53.567 C5_DRV3.2 96.704,53.529 U4_DRV3.40 96.704,49.454 96.5,49.25 96.5,47.25 97,46.75 98.25,46.75 99.104,45.896 U4_DRV3.19 99.122,38.955 99.122,35.808 Y2_DRV3.4 Y2_DRV3.1 ; C1.2 131.047,64.5 U2.21 U2.22 ; v1(132.5,55) 133.313,54.187 C5_DRV2.2 134.218,54.149 U4_DRV2.40 134.218,50.282 136.857,47.643 136.857,42.089 136.618,41.849 U4_DRV2.19 136.647,39.892 136.647,36.488 136.845,36.29 Y2_DRV2.4 Y2_DRV2.1 ; U2.3 139.414,64 139.714,63.7 Y1.4 Y1.1 ; C5_DRV1.2 169.872,54.772 U4_DRV1.40 169.872,50.878 171.25,49.5 172.25,49.5 172.75,49 172.75,48.25 172.272,47.772 U4_DRV1.19 172.272,37.438 Y2_DRV1.4 Y2_DRV1.1
+5: J3.9 J6.3 J6.5
+12: C2_DRV1.2 C2_DRV2.2 C2_DRV3.2 C3_DRV1.1 C3_DRV2.1 C3_DRV3.1 C4_DRV1.2 C4_DRV2.2 C4_DRV3.2 U4_DRV1.4 U4_DRV1.30 U4_DRV1.36 U4_DRV2.4 U4_DRV2.30 U4_DRV2.36 U4_DRV3.4 U4_DRV3.30 U4_DRV3.36 | length 38.5
  Top Layer w0.254: U4_DRV1.4 U4_DRV1.4@164.938,47.956
  Top Layer w0.5: U4_DRV3.4 91.727,46.35 v1(93.579,46.349) v1(93.579,46.349) ; v1(99.5,55.5) 99.5,53.68 C3_DRV3.1 99.448,53.578 99.904,53.122 U4_DRV3.36 ; v1(101.5,46.5) 101.645,46.355 103.279,46.355 U4_DRV3.30 ; U4_DRV2.4 129.243,47.304 129.918,47.304 131.595,47.304 v1(131.653,47.362) ; v1(137,56) 137,54.297 C3_DRV2.1 136.962,54.209 137.431,53.739 137.431,51.492 U4_DRV2.36 ; v1(139,48) 139.208,48 139.905,47.304 140.792,47.304 U4_DRV2.30 ; U4_DRV1.4@164.938,47.916 164.946,47.908 166.639,47.908 v1(166.75,47.797) ; v1(172.5,57) 172.5,54.828 C3_DRV1.1 172.567,53.683 173.072,53.178 U4_DRV1.36 ; v1(174.918,47.896) 174.93,47.908 176.447,47.908 U4_DRV1.30
  Bottom Layer w0.254: C2_DRV3.2@95.455,46.349 C2_DRV3.2 ; v1(131.653,47.362) v1@131.703,47.312 ; C2_DRV2.2@132.908,47.312 C2_DRV2.2@133.25,47.654
  Bottom Layer w0.5: v1(93.579,46.349) C2_DRV3.2@95.455,46.349 ; v1(101.5,46.5) C4_DRV3.2 ; v1@131.703,47.312 C2_DRV2.2@132.908,47.312 ; v1(139,48) 139.208,48 139.708,48.5 C4_DRV2.2 ; v1(166.75,47.797) 166.958,47.797 167.173,48.012 169.088,48.012 C2_DRV1.2 ; v1(174.918,47.896) 175.066,47.749 176.451,47.749 C4_DRV1.2
+15: J5.7
-15: J5.8
"CH A": J6.2
"CH B": J6.4
"CSN AZI": U1.96 U4_DRV1.18 | length 36
  Top Layer w0.254: U4_DRV1.18 171.472,48.175 v2(172.02,48.723)
  Bottom Layer w0.254: v2(172.02,48.723) 172.02,50.711 172.335,51.027 172.335,52.948 170.5,54.783 170.5,61.25 180.5,71.25
"CSN CTRL": U1.29 U2.7 | length 18.9
  Top Layer w0.254: U2.7 139.435,66 v2(139.954,66.519)
  Bottom Layer w0.254: v2(139.954,66.519) 152.519,66.519 155.5,69.5
"CSN ELV": U1.44 U4_DRV2.18 | length 20.3
  Top Layer w0.254: U4_DRV2.18 135.818,46.61 136.141,46.933 v2(136.141,47)
  Bottom Layer w0.254: v2(136.141,47) 136.622,47.481 136.731,47.481 142.75,53.5 142.75,57.25
"CSN GPS": U1.97 U3.18 | length 9.2
  Top Layer w0.254: U3.18 216.52,63.27 217.25,64 217.25,70.5
"CSN POL": U1.45 U4_DRV3.18 | length 26.4
  Top Layer w0.254: v2(98.25,45.75) 98.277,45.723 98.277,39 U4_DRV3.18
  Bottom Layer w0.254: v2(98.25,45.75) 111.25,58.75 112.499,58.75
GND: C1.1 C2_DRV1.1 C2_DRV2.1 C2_DRV3.1 C4_DRV1.1 C4_DRV2.1 C4_DRV3.1 C5_DRV1.1 C5_DRV2.1 C5_DRV3.1 C6_DRV1.1 C6_DRV2.1 C6_DRV3.1 J4.M1 J4.M2 J5.6 J5.S1 J5.S2 J6.1 J7.2 J7.3 J7.4 J7.5 R3_DRV1.2 R3_DRV2.2 R3_DRV3.2 R5_DRV1.2 R5_DRV2.2 R5_DRV3.2 R8.2 R9.2 R10.2 R11.2 R12.2 R13.2 R14.2 R15.2 R16.2 U2.4 U2.6 U2.23 U2.25 U3.7 U3.8 U3.10 U3.23 U3.24 U3.25 U3.26 U3.27 U3.28 U3.29 U3.30 U3.31 U4_DRV1.17 U4_DRV1.39 U4_DRV1.43 U4_DRV1.44 U4_DRV2.17 U4_DRV2.39 U4_DRV2.43 U4_DRV2.44 U4_DRV3.17 U4_DRV3.39 U4_DRV3.43 U4_DRV3.44 Y1.2 Y2_DRV1.2 Y2_DRV2.2 Y2_DRV3.2 | length 133.2
  Top Layer w0.254: v1(87,40.5) 87,42.38 R3_DRV3.2 ; v1(91.75,50.5) 93.474,50.5 U4_DRV3.44 U4_DRV3.43 ; v1(93.5,33) 93.542,33 94.329,33.787 C6_DRV3.1 ; C5_DRV3.1 96.742,55.317 97.583,54.476 97.583,50.609 97.489,50.515 97.489,48.204 v1(97.473,48.188) ; U4_DRV3.17 97.504,33.996 98.306,33.194 100.306,33.194 v1@100.47,33.03 ; Y2_DRV3.2 100.47,34.76 v1@100.47,33.03 ; v1(100.5,33) v1@100.47,33.03 ; R5_DRV3.2 108,42.388 v1(108,40.5) ; R3_DRV2.2 124.709,41.541 v1(124.75,41.5) ; v1(129.25,51.5) 130.996,51.5 U4_DRV2.44 U4_DRV2.43 ; v1(129.5,35.25) 131.77,35.25 C6_DRV2.1 ; C1.1 131.699,63.02 132.178,63.5 U2.23 ; v1(133.75,60.25) 133.802,60.302 U2.25 ; U4_DRV2.17 135.009,39.912 135.009,36.259 v1(135,36.25) 135,35 135.75,34.25 137.1,34.25 138.14,35.29 Y2_DRV2.2 ; v1(135.5,57.5) 135.5,57.281 134.256,56.037 C5_DRV2.1 134.256,55.937 135.25,54.942 135.25,52.231 135.018,51.999 U4_DRV2.39 135.145,51.351 135.145,50.694 v1(136.643,49.195) ; U2.6 139.836,65.5 140.16,65.824 141.779,65.824 141.995,65.607 141.995,65.005 Y1.2 ; R5_DRV2.2 145.5,43.102 v1(145.5,41) ; v1(160.25,41.5) 160.25,43.786 R3_DRV1.2 ; v1(165,36.25) 167.403,36.25 C6_DRV1.1 ; v1(166.75,54.75) 166.711,54.711 166.711,52.129 U4_DRV1.44 U4_DRV1.43 ; U4_DRV1.17 170.672,36.078 172,34.75 v1(172.25,34.75) 172.339,34.839 173.089,34.839 173.472,35.222 173.472,36.092 173.67,36.29 Y2_DRV1.2 ; U4_DRV1.39@170.672,52.611 170.75,52.689 170.75,55.72 169.91,56.56 C5_DRV1.1 169.91,56.66 171.556,58.306 171.556,59.056 v1(171.75,59.25) ; R5_DRV1.2 181,43.869 v1(181,42) ; U3.10 206.92,56.92 208,58 U3.25 ; U3.8 U3.7 207.27,60.73 U3.25 ; U3.24 U3.27 ; U3.23 U3.28 U3.29 ; U3.26 U3.27 ; U3.31 U3.30 U3.29 ; U3.25 U3.27 ; U3.27 U3.29
  Bottom Layer w0.254: C2_DRV3.1 97.32,48.035 v1(97.473,48.188) ; C4_DRV3.1 105.1,46.5 105.473,46.873 105.473,46.923 106.25,47.7 v1(106.25,49) ; C2_DRV2.1 135.206,47.354 136.449,48.598 136.449,49.001 v1(136.643,49.195) ; C4_DRV2.1 142.35,48.5 144.1,50.25 v1(144.25,50.25) ; C2_DRV1.1 171.016,48.116 171.016,49.396 ; C4_DRV1.1 178.55,47.5 180.5,49.45 v1(180.5,49.5)
  other v1: 207.46,57.46 209,61 211,63
"GPS ON_OFF": U1.99 U3.6 | length 43.9
  Top Layer w0.254: U1.99 185.25,90.5 189,86.75 189,75.25 202.25,62 U3.6
L+/AES+: J5.1
L-/AES-: J5.2
LED0: DS2.1 U1.114
LED1: DS5.1 U1.115
LED2: DS8.1 U1.116
LED3: DS3.1 U1.117
LED4: DS6.1 U1.118
LED5: DS9.1 U1.119
LED6: DS4.1 U1.122
LED7: DS7.1 U1.123
LED8: DS10.1 U1.77
MISO: U1.28 U2.14 U3.3 U4_DRV1.14 U4_DRV2.14 U4_DRV3.14 | length 193.3
  Top Layer w0.254: U4_DRV3.14 95.104,41.854 95.5,42.25 v2(95.5,44) ; U4_DRV2.14 132.618,42.56 132.941,42.883 v2(132.941,45.016) ; U2.14 134.802,68.052 136,69.25 v2(137,69.25) ; v2(153.25,45.546) 153.25,78.5 156.25,81.5 U1.28 ; U4_DRV1.14 168.261,40.544 168.261,45.017 v2(168.79,45.546) ; v2(200.5,65.75) 205.09,65.75 U3.3
  Bottom Layer w0.254: v2(95.5,44) 115.887,44 116.459,44.573 116.832,44.945 ; 116.832,44.981 132.905,44.981 v2(132.941,45.016) 138.963,45.016 139.492,45.546 v2(153.25,45.546) v2(168.79,45.546) 171.046,45.546 191.25,65.75 v2(200.5,65.75) ; v2(137,69.25) v2(153.25,69.25)
MOSI: U1.27 U2.10 U3.4 U4_DRV1.15 U4_DRV2.15 U4_DRV3.15 | length 193.1
  Top Layer w0.254: U4_DRV3.15 95.904,41.729 96.5,42.325 v2(96.5,44.5) ; U4_DRV2.15 133.418,42.418 133.95,42.95 v2(133.95,45.622) ; U2.10 136.802,67.988 137,68.185 v2(137,68.25) ; v2(152.25,46.253) v2(152.25,68.25) 152.25,79 155.25,82 U1.27 ; U4_DRV1.15 169.072,42.822 169.497,43.247 v2(169.497,46.253) ; v2(202.75,64.5) 205.11,64.5 U3.4
  Bottom Layer w0.254: v2(96.5,44.5) 115,44.5 116,45.5 133.761,45.5 133.883,45.622 v2(133.95,45.622) 138.372,45.622 139.003,46.253 v2(152.25,46.253) v2(169.497,46.253) 171.121,46.253 191.118,66.25 202.25,66.25 202.75,65.75 v2(202.75,64.5) ; v2(137,68.25) v2(152.25,68.25)
NetC3_DRV1_2: C3_DRV1.2 U4_DRV1.35 | length 2.9
  Top Layer w0.254: U4_DRV1.35 173.875,52.094 173.875,53.18 174.367,53.672 C3_DRV1.2
NetC3_DRV2_2: C3_DRV2.2 U4_DRV2.35 | length 3
  Top Layer w0.254: U4_DRV2.35 138.218,53.765 138.662,54.209 C3_DRV2.2
NetC3_DRV3_2: C3_DRV3.2 U4_DRV3.35 | length 3.3
  Top Layer w0.254: U4_DRV3.35 100.704,53.134 101.148,53.578 C3_DRV3.2
NetC6_DRV1_2: C6_DRV1.2 U4_DRV1.13 | length 2.5
  Top Layer w0.254: C6_DRV1.2 167.472,38.012 U4_DRV1.13
NetC6_DRV2_2: C6_DRV2.2 U4_DRV2.13 | length 2.8
  Top Layer w0.254: C6_DRV2.2 131.818,37.098 U4_DRV2.13
NetC6_DRV3_2: C6_DRV3.2 U4_DRV3.13 | length 2.4
  Top Layer w0.254: U4_DRV3.13 94.304,36.585 C6_DRV3.2
NetDS1_1: DS1.1 R7.1
NetDS1_3: DS1.3 R6.1
NetDS1_4: DS1.4 R1.1
NetDS2_2: DS2.2 R8.1
NetDS3_2: DS3.2 R9.1
NetDS4_2: DS4.2 R10.1
NetDS5_2: DS5.2 R11.1
NetDS6_2: DS6.2 R12.1
NetDS7_2: DS7.2 R13.1
NetDS8_2: DS8.2 R14.1
NetDS9_2: DS9.2 R15.1
NetDS10_2: DS10.2 R16.1
NetDS11_1: DS11.1 R19.1
NetDS11_3: DS11.3 R18.1
NetDS11_4: DS11.4 R17.1
NetJ1_1: J1.1 U4_DRV1.2 U4_DRV1.3 U4_DRV1.7 U4_DRV1.8 | length 40.8
  Top Layer w0.7: 165.332,49.112 162.41,49.112 162,48.702 162,45.55 162.41,45.14 165.373,45.14
  Top Layer w1.4: 161.5,47 158.75,47 157.5,45.75 157.5,31.091 J1.1
NetJ1_2: J1.2 U4_DRV1.5 U4_DRV1.6 U4_DRV1.10 U4_DRV1.11 | length 41.3
  Top Layer w0.7: 164.42,42.712 166.518,42.712 167.089,43.283 167.089,44.352 v1(167.199,44.461) ; 164.5,46.712 166.774,46.712 167.184,46.302 v1@167.184,44.461
  Bottom Layer w1.4: v1(167.199,44.461) 162.671,39.934 162.671,21.556 163.491,20.736 167.372,20.736 168.337,21.7 168.337,22.978 J1.2
NetJ1_6: J1.6 U4_DRV1.26 U4_DRV1.27 U4_DRV1.31 U4_DRV1.32 | length 47.3
  Top Layer w0.7: 176,45.112 178.59,45.112 179,45.522 179,47.109 179,48.702 178.59,49.112 176,49.112
  Top Layer w1.4: J1.6 169.148,28 180,28 183,31 183,46.289 182.18,47.109 179,47.109
NetJ1_7: J1.7 U4_DRV1.23 U4_DRV1.24 U4_DRV1.28 U4_DRV1.29 | length 29.9
  Top Layer w0.7: 176.886,42.712 174.41,42.712 174,43.122 v1(174,44.712) 174.109,44.821 174.109,46.302 174.519,46.712 176.922,46.712
  Bottom Layer w1.4: J1.7 169.715,40.427 v1(174,44.712)
NetJ2_1: J2.1 U4_DRV2.2 U4_DRV2.3 U4_DRV2.7 U4_DRV2.8 | length 39.8
  Top Layer w0.7: 129.75,44.5 126.41,44.5 126,44.91 126,46.5 126,48.09 126.41,48.5 129.75,48.5
  Top Layer w1.4: 126,46.5 123.491,46.5 122.671,45.68 122.671,28.999 J2.1
NetJ2_2: J2.2 U4_DRV2.5 U4_DRV2.6 U4_DRV2.10 U4_DRV2.11 | length 43.3
  Top Layer w0.7: 128.75,42.1 131.59,42.1 132,42.51 v1(132,44) 132,45.69 131.59,46.1 128.75,46.1
  Bottom Layer w1.4: J2.2 131.369,22.968 131.369,21.879 130.49,21 125.82,21 125,21.82 125,37 v1(132,44)
NetJ2_6: J2.6 U4_DRV2.26 U4_DRV2.27 U4_DRV2.31 U4_DRV2.32 | length 50
  Top Layer w0.7: 140.25,48.5 143.59,48.5 144,48.09 144,46.485 144,44.91 143.59,44.5 140.796,44.5
  Top Layer w1.4: J2.6 133.191,29 146,29 149,32 149,44 146.515,46.485 144,46.485
NetJ2_7: J2.7 U4_DRV2.23 U4_DRV2.24 U4_DRV2.28 U4_DRV2.29 | length 30.3
  Top Layer w0.7: 141.25,42.1 138.41,42.1 138,42.51 v1(138,44) 138,45.69 138.41,46.1 141.25,46.1
  Bottom Layer w1.4: J2.7 132.775,38.775 v1(138,44)
NetJ3_1: J3.1 U4_DRV3.2 U4_DRV3.3 U4_DRV3.7 U4_DRV3.8 | length 39.4
  Top Layer w0.7: 92.25,43.551 88.41,43.551 88,43.962 88,45.551 88,47.141 88.41,47.551 92.25,47.551
  Top Layer w1.4: 88,45.551 86.551,45.551 85,44 85,29.62 J3.1
NetJ3_2: J3.2 U4_DRV3.5 U4_DRV3.6 U4_DRV3.10 U4_DRV3.11 | length 39.4
  Top Layer w0.7: 91.25,41.152 93.59,41.152 94,41.562 v1(94,43) 94,44.741 93.59,45.151 91.25,45.151
  Bottom Layer w1.4: v1(94,43) 89,38 89,21.82 89.82,21 93.445,21 94.324,21.879 94.324,22.964 J3.2
NetJ3_6: J3.6 U4_DRV3.26 U4_DRV3.27 U4_DRV3.31 U4_DRV3.32 | length 48.2
  Top Layer w0.7: 102.75,43.551 106.59,43.551 107,43.962 107,45.551 107,47.141 106.59,47.551 102.75,47.551
  Top Layer w1.4: J3.6 95.15,28 107,28 110,31 110,44.731 109.18,45.551 107,45.551
NetJ3_7: J3.7 U4_DRV3.23 U4_DRV3.24 U4_DRV3.28 U4_DRV3.29 | length 27.4
  Top Layer w0.7: 103.283,41.152 101.41,41.152 101,41.562 v1(101,43) 101,44.741 101.41,45.151 103.283,45.151
  Bottom Layer w1.4: J3.7 95.73,37.73 v1(101,43)
NetJ7_1: J7.1 U3.11 | length 10.7
  Top Layer w0.254: J7.1 205,55.5 U3.11
NetR2_DRV1_1: R2_DRV1.1 U4_DRV1.12 | length 4.6
  Top Layer w0.254: R2_DRV1.1 162.203,39.98 U4_DRV1.12@166.722,39.98
NetR2_DRV1_2: R2_DRV1.2 R3_DRV1.1 U4_DRV1.9 | length 4.9
  Top Layer w0.254: R2_DRV1.2 R3_DRV1.1 162.176,43.912 U4_DRV1.9
NetR2_DRV2_1: R2_DRV2.1 U4_DRV2.12 | length 4.7
  Top Layer w0.254: R2_DRV2.1 130.891,39.47 131.018,39.597 U4_DRV2.12
NetR2_DRV2_2: R2_DRV2.2 R3_DRV2.1 U4_DRV2.9 | length 4.8
  Top Layer w0.254: R2_DRV2.2 126.73,43.065 R3_DRV2.1 126.522,43.3 U4_DRV2.9
NetR2_DRV3_1: R2_DRV3.1 U4_DRV3.12 | length 4.7
  Top Layer w0.254: R2_DRV3.1 93.377,38.708 93.504,38.835 U4_DRV3.12
NetR2_DRV3_2: R2_DRV3.2 R3_DRV3.1 U4_DRV3.9 | length 5
  Top Layer w0.254: R2_DRV3.2 88.995,42.634 89.017,42.656 89.322,42.351 U4_DRV3.9
NetR4_DRV1_1: R4_DRV1.1 U4_DRV1.22 | length 5
  Top Layer w0.254: U4_DRV1.22 174.672,40.067 174.799,39.94 R4_DRV1.1
NetR4_DRV1_2: R4_DRV1.2 R5_DRV1.1 U4_DRV1.25 | length 4.9
  Top Layer w0.254: U4_DRV1.25 179.157,43.912 R5_DRV1.1 179.181,43.888 R4_DRV1.2
NetR4_DRV2_1: R4_DRV2.1 U4_DRV2.22 | length 5
  Top Layer w0.254: U4_DRV2.22 139.018,39.552 139.145,39.425 143.441,39.425 R4_DRV2.1
NetR4_DRV2_2: R4_DRV2.2 R5_DRV2.1 U4_DRV2.25 | length 4.9
  Top Layer w0.254: U4_DRV2.25 143.503,43.3 R5_DRV2.1 143.527,43.276 R4_DRV2.2
NetR4_DRV3_1: R4_DRV3.1 U4_DRV3.22 | length 4.7
  Top Layer w0.254: U4_DRV3.22 101.504,38.835 101.631,38.708 R4_DRV3.1
NetR4_DRV3_2: R4_DRV3.2 R5_DRV3.1 U4_DRV3.25 | length 4.9
  Top Layer w0.254: U4_DRV3.25 105.872,42.351 R5_DRV3.1 106.054,40.549 R4_DRV3.2
NetU2_5: U2.5 Y1.3 | length 3
  Top Layer w0.254: U2.5 Y1.3
NetU2_15: U2.15 U4_DRV1.42 | length 48.2
  Top Layer w0.254: v2(134.25,69) 134.25,68.933 134.302,68.881 U2.15 ; v2(165.75,62.75) 166.683,62.75 168.272,61.161 U4_DRV1.42
  Bottom Layer w0.254: v2(134.25,69) 135.158,69 141.408,62.75 v2(165.75,62.75)
NetU2_17: U2.17 U4_DRV1.41 | length 48.5
  Top Layer w0.254: v2(132.897,67.396) 133.104,67.189 U2.17 ; v2(169,60.75) 169.047,60.703 169.047,60.529 169.072,60.504 U4_DRV1.41
  Bottom Layer w0.254: v2(132.897,67.396) 135.604,67.396 141,62 167.75,62 v2(169,60.75)
NetU2_18: U2.18 U4_DRV2.42 | length 19.7
  Top Layer w0.254: U4_DRV2.42 132.618,52.632 129.5,55.75 129.5,65.75 130.227,66.477 132.023,66.477 132.5,66 U2.18
NetU2_19: U2.19 U4_DRV3.42 | length 52.1
  Top Layer w0.254: v2(93,55) 93,54 95.104,51.896 U4_DRV3.42 ; v2(131.779,65.977) 131.779,65.975 132.254,65.5 U2.19
  Bottom Layer w0.254: v2(93,55) 93,58.25 97.5,62.75 128.553,62.75 131.779,65.975 v2(131.779,65.977)
NetU2_20: U2.20 U4_DRV3.41 | length 50.6
  Top Layer w0.254: v2(93.75,58) 93.75,54 95.895,51.855 95.895,50.539 U4_DRV3.41 ; v2(131.766,64.977) 131.789,65 U2.20@133.104,65
  Bottom Layer w0.254: v2(93.75,58) 97.75,62 128.789,62 v2(131.766,64.977)
NetU2_27: U2.27 U4_DRV2.41 | length 13
  Top Layer w0.254: U4_DRV2.41 133.418,52.679 131.5,54.596 131.5,56.442 134.802,59.744 U2.27
NetU4_DRV1_21: U4_DRV1.21 Y2_DRV1.3 | length 3.3
  Top Layer w0.254: Y2_DRV1.3 173.872,37.442 U4_DRV1.21
NetU4_DRV1_38: U4_DRV1.38
NetU4_DRV2_21: U4_DRV2.21 Y2_DRV2.3 | length 3.6
  Top Layer w0.254: Y2_DRV2.3 138.204,36.304 138.204,39.907 U4_DRV2.21
NetU4_DRV2_38: U4_DRV2.38
NetU4_DRV3_21: U4_DRV3.21 Y2_DRV3.3 | length 3.3
  Top Layer w0.254: Y2_DRV3.3 100.49,35.79 100.688,35.988 100.688,36.038 100.704,36.054 U4_DRV3.21
NetU4_DRV3_38: U4_DRV3.38
POL: J3.4
R+: J5.3
R-: J5.4
REF1: U2.31
REF2: U2.1
REF3: U2.2
REFR1: U2.28
REFR2: U2.13
REFR3: U2.29
SCK: U1.26 U2.8 U3.17 U4_DRV1.16 U4_DRV2.16 U4_DRV3.16 | length 206.8
  Top Layer w0.254: U4_DRV3.16 96.704,41.704 97.332,42.332 v2(97.332,45.055) ; U4_DRV2.16 134.218,42.218 135,43 v2(135,46.25) ; U2.8 138,67 138.25,67.25 151.205,67.25 ; v2(151.205,47) 151.205,67.25 ; U1.26 154.25,82.5 151.205,79.455 151.205,67.25 ; U4_DRV1.16 169.872,42.622 170.809,43.559 170.809,45.092 170.5,45.4 v2(170.5,47) ; U3.17 214.855,61.995 v2(216.718,61.995)
  Bottom Layer w0.254: v2(97.332,45.055) 114.055,45.055 115.25,46.25 v2(135,46.25) 137.938,46.25 138.688,47 159.157,47 159.222,46.935 170.368,46.935 170.433,47 171.283,47 191.033,66.75 211.962,66.75 v2(216.718,61.995)
STA_BLU: R19.2
STA_BLU1: U1.78
STA_BLU2: R7.2 U1.85
STA_GRN: R17.2
STA_GRN2: R1.2 U1.81
STA_RED: R18.2
STA_RED1: U1.80
STA_RED2: R6.2 U1.82
pads on no net: DS4.3 DS7.3 DS10.3 J1. J1.3 J1.4 J1.5 J1.8 J1.9 J2. J2.3 J2.4 J2.5 J2.8 J2.9 J3. J3.3 J3.5 J3.8 J4.1 J4.2 J4.3 J4.4 J4.5 J4.6 J4.7 J4.8 J4.9 J4.10 J4.11 J4.12 J4.13 J4.14 J4.15 J5.5 J5.MH1 J5.MH2 J6. J6.6 J6.7 J6.8 J6.9 J8.1 J8.2 J8.3 J8.4 J8.Shell U1.1 U1.2 U1.3 U1.4 U1.5 U1.6 U1.7 U1.8 U1.9 U1.10 U1.11 U1.12 U1.13 U1.14 U1.15 U1.16 U1.17 U1.18 U1.19 U1.20 U1.21 U1.22 U1.23 U1.24 U1.25 U1.30 U1.31 U1.32 U1.33 U1.34 U1.35 U1.36 U1.37 U1.38 U1.39 U1.40 U1.41 U1.42 U1.43 U1.46 U1.47 U1.48 U1.49 U1.50 U1.51 U1.52 U1.53 U1.54 U1.55 U1.56 U1.57 U1.58 U1.59 U1.60 U1.61 U1.62 U1.63 U1.64 U1.65 U1.66 U1.67 U1.68 U1.69 U1.70 U1.71 U1.72 U1.73 U1.74 U1.75 U1.76 U1.79 U1.83 U1.84 U1.86 U1.87 U1.88 U1.89 U1.90 U1.91 U1.92 U1.93 U1.94 U1.95 U1.98 U1.100 U1.101 U1.102 U1.103 U1.104 U1.105 U1.106 U1.107 U1.108 U1.109 U1.110 U1.111 U1.112 U1.113 U1.120 U1.121 U1.124 U1.125 U1.126 U1.127 U1.128 U1.129 U1.130 U1.131 U1.132 U1.133 U1.134 U1.135 U1.136 U1.137 U1.138 U1.139 U1.140 U1.141 U1.142 U1.143 U1.144 U2.9 U2.11 U2.12 U2.16 U2.24 U2.26 U2.30 U2.32 U2.33 U3.1 U3.2 U3.5 U3.9 U3.12 U3.13 U3.14 U3.15 U3.16 U3.19 U3.21 U4_DRV1.1 U4_DRV1.20 U4_DRV1.33 U4_DRV1.34 U4_DRV1.37 U4_DRV2.1 U4_DRV2.20 U4_DRV2.33 U4_DRV2.34 U4_DRV2.37 U4_DRV3.1 U4_DRV3.20 U4_DRV3.33 U4_DRV3.34 U4_DRV3.37

## Polygon pours and split planes (outlines as drawn)
GND on Int1 (GND) (split plane): 256.49,6.51 221.51,6.51 221.51,38.25 221.501,38.35 221.472,38.445 221.424,38.534 221.361,38.611 221.284,38.674 221.195,38.722 221.1,38.751 221,38.76 188,38.76 187.9,38.751 187.805,38.722 187.716,38.674 187.639,38.611 187.576,38.534 187.528,38.445 187.499,38.35 187.49,38.25 187.49,6.51 81.51,6.51 81.51,146.49 256.49,146.49
+12 on Int2 (PWR) (split plane): 256.49,6.51 221.51,6.51 221.51,38.25 221.501,38.35 221.472,38.445 221.424,38.534 221.361,38.611 221.284,38.674 221.195,38.722 221.1,38.751 221,38.76 188,38.76 187.9,38.751 187.805,38.722 187.716,38.674 187.639,38.611 187.576,38.534 187.528,38.445 187.499,38.35 187.49,38.25 187.49,6.51 81.51,6.51 81.51,146.49 256.49,146.49

## Silkscreen, mask and mechanical layers (free items; w line width, h text height)
Top Overlay:
  text "Encoder" at 232,27.042 h5
  text "Polarity" at 164.5,11.382 h5
  text "Azimuth" at 89,11.292 h5
  text "Elevation" at 126,11.292 h5

## Text inside footprints (layer, text, board x,y; h text height)
J4: Top Overlay "15" at 102.48,131.095 h1.02 r90
U1: Top Overlay "*" at 156.389,94.996 h1.27; Top 3D Body "*" at 158.967,94.615 h1.27
U2: Top Overlay "*" at 139.559,63.635 h1.27 r180; Top 3D Body "*" at 137.076,63.635 h1.27 r180
U4_DRV1: Top Overlay "*" at 163.166,50.458 h1.27; Top 3D Body "*" at 165.732,50.077 h1.27
U4_DRV2: Top Overlay "*" at 127.512,49.846 h1.27; Top 3D Body "*" at 130.077,49.465 h1.27
U4_DRV3: Top Overlay "*" at 89.998,48.897 h1.27; Top 3D Body "*" at 92.564,48.516 h1.27